# EAGLE board sparkfun-samd21g-r3-panel-v10 (EAGLE 7.4.0), part 1 of 3
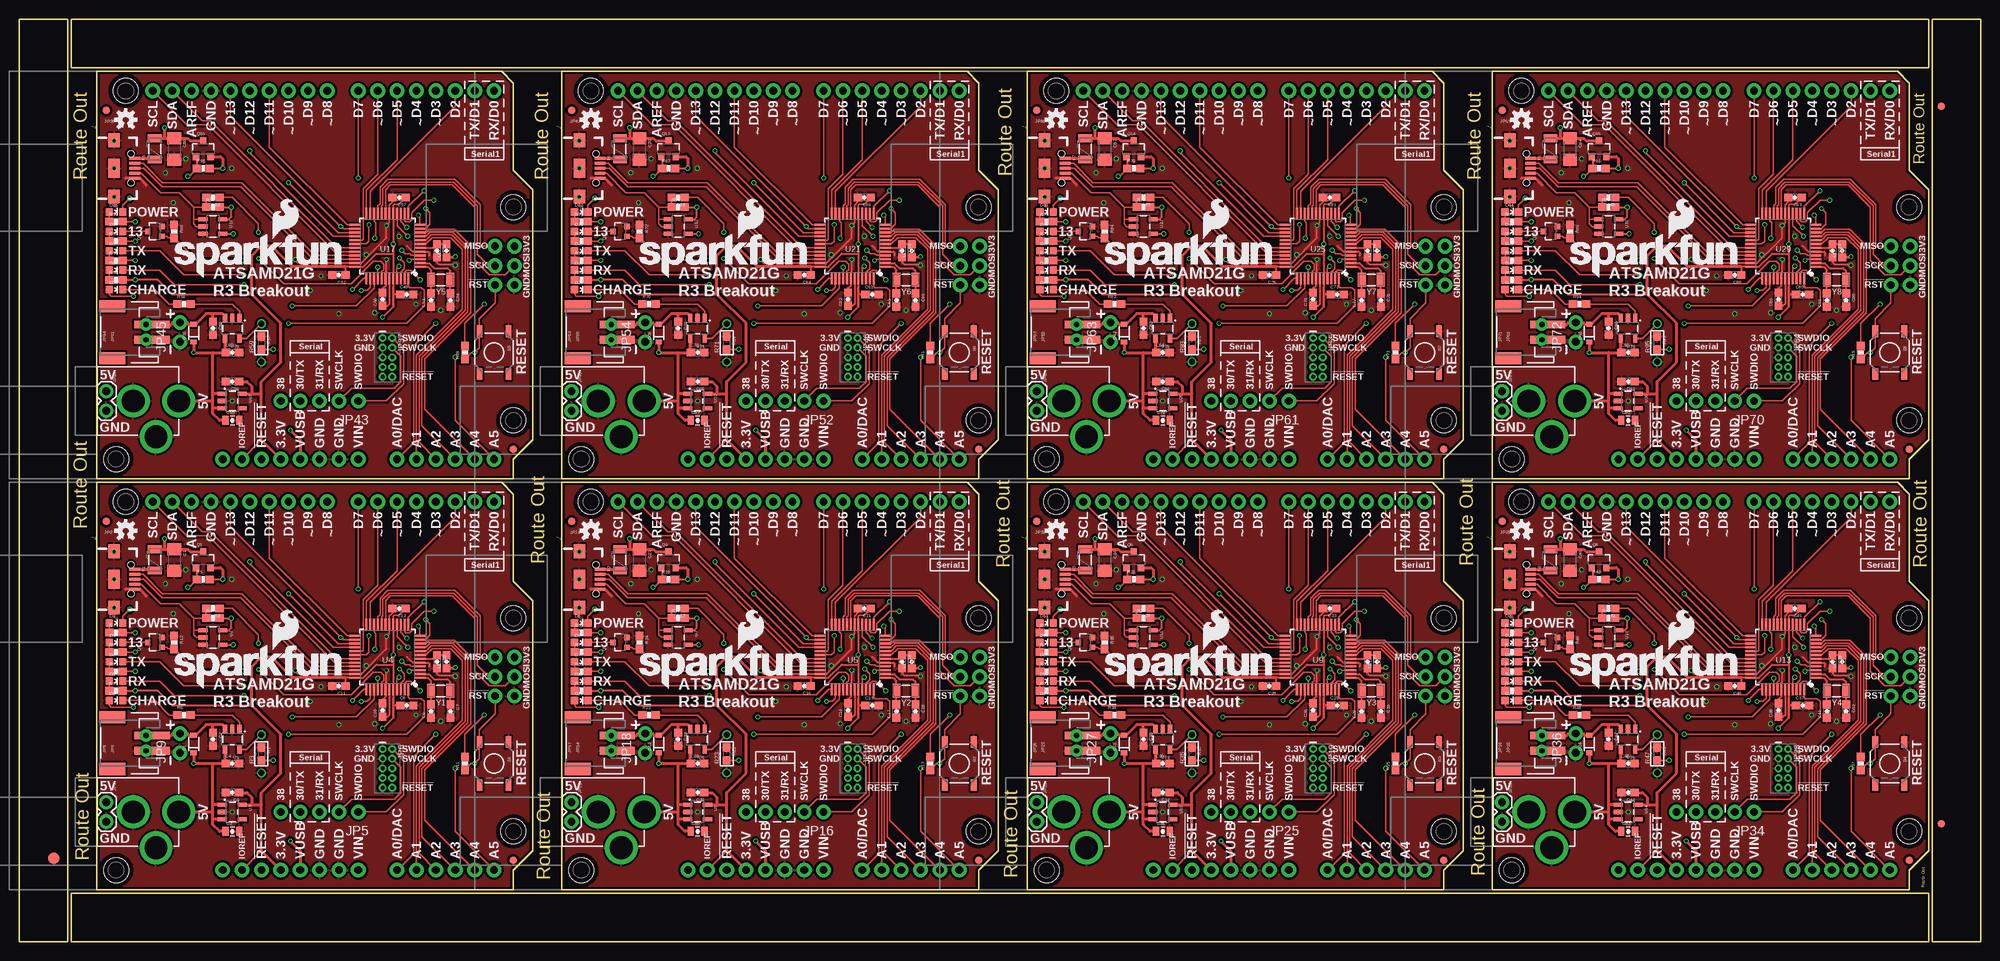
[diagram p0: board, top side]
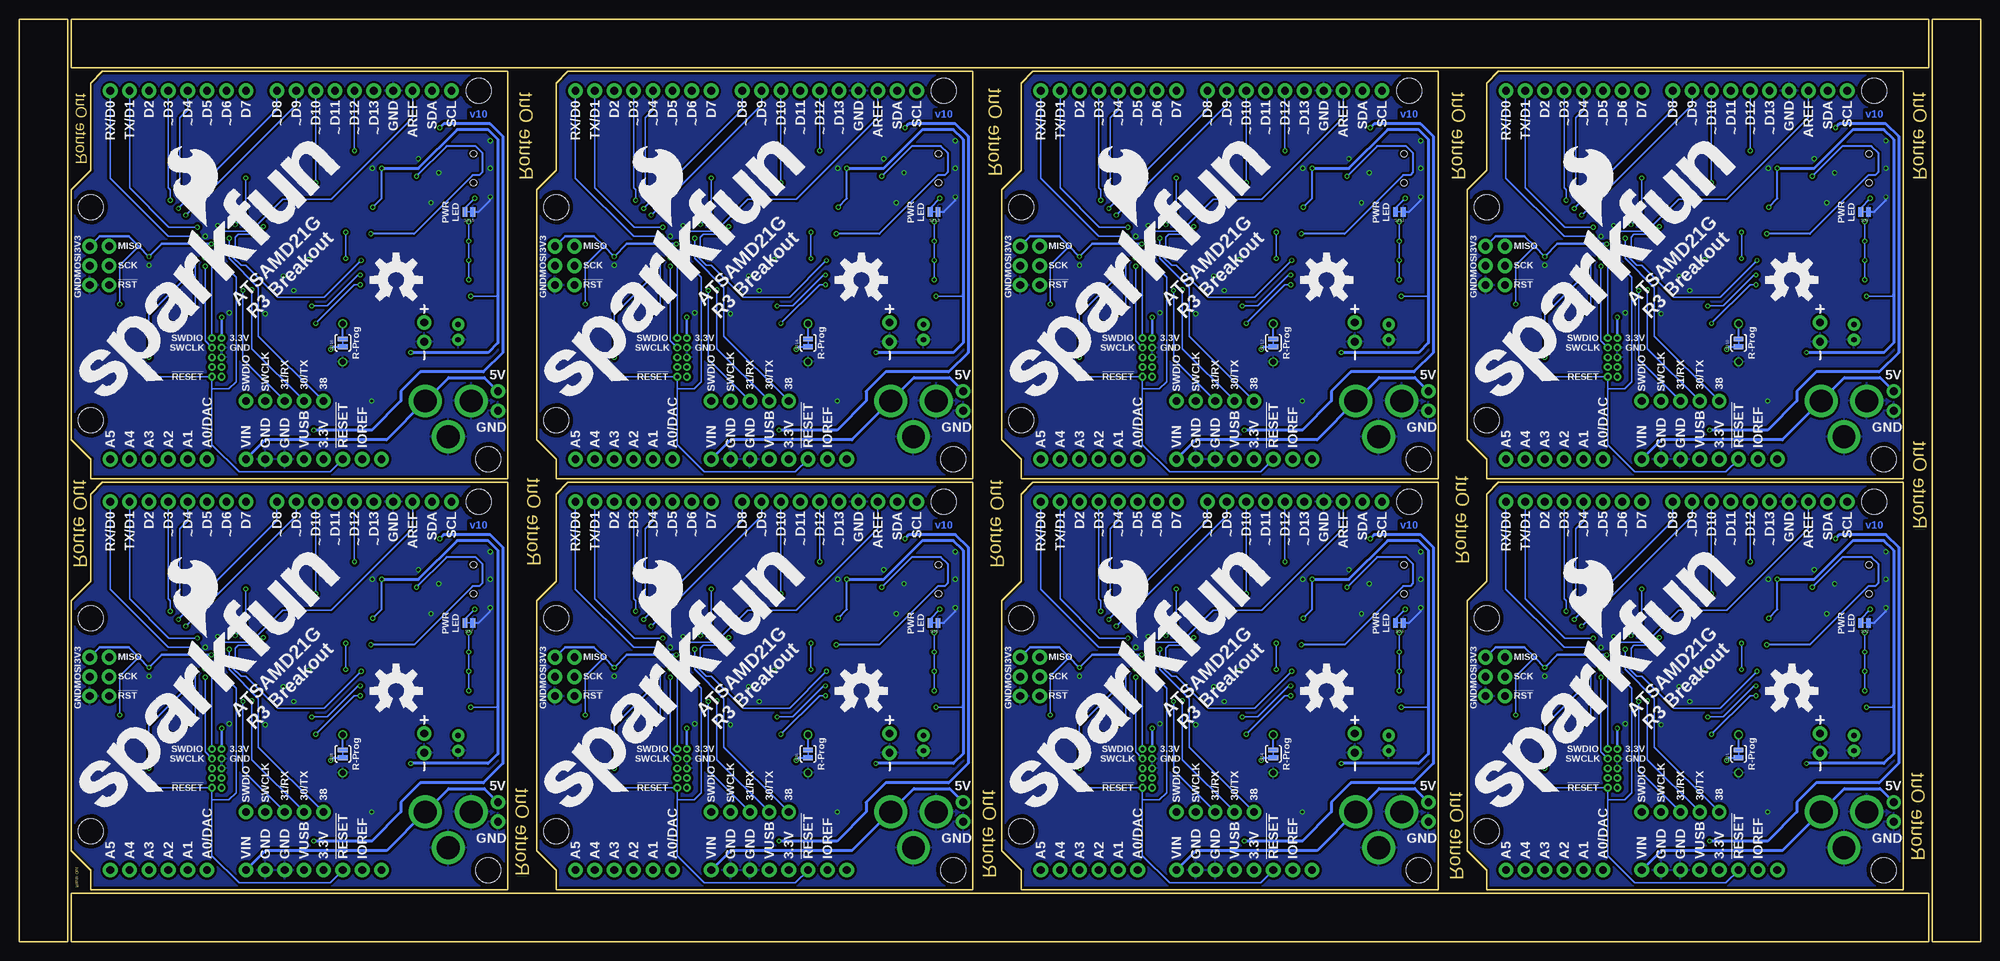
[diagram p1: board, bottom side, seen from below]

Size 257.05 x 120.9 mm. Coordinates in mm from the lower left corner, seen from the top.
Outline: 6.35,79.25 6.35,0 0,0 0,29.72
Outline: 0,27.18 0,120.9 6.35,120.9 6.35,76.71
Outline: 82.55,0 6.86,0 6.86,6.35 33.02,6.35
Outline: 30.48,6.35 250.19,6.35 250.19,0 80.01,0
Outline: 257.05,79.25 257.05,0 250.7,0 250.7,29.72
Outline: 250.7,27.18 250.7,120.9 257.05,120.9 257.05,76.71
Outline: 177.8,120.9 250.19,120.9 250.19,114.55 227.33,114.55
Outline: 229.87,114.55 6.86,114.55 6.86,120.9 180.34,120.9
Outline: 10.16,60.2 10.16,6.86 64.77,6.86 64.77,9.4 67.31,11.94 67.31,44.7 64.77,47.24 64.77,58.67 63.25,60.2 10.16,60.2
Outline: 71.12,60.2 71.12,6.86 125.73,6.86 125.73,9.4 128.27,11.94 128.27,44.7 125.73,47.24 125.73,58.67 124.21,60.2 71.12,60.2
Outline: 132.08,60.2 132.08,6.86 186.69,6.86 186.69,9.4 189.23,11.94 189.23,44.7 186.69,47.24 186.69,58.67 185.17,60.2 132.08,60.2
Outline: 193.04,60.2 193.04,6.86 247.65,6.86 247.65,9.4 250.19,11.94 250.19,44.7 247.65,47.24 247.65,58.67 246.13,60.2 193.04,60.2
Outline: 10.16,114.05 10.16,60.71 64.77,60.71 64.77,63.25 67.31,65.79 67.31,98.55 64.77,101.09 64.77,112.52 63.25,114.05 10.16,114.05
Outline: 71.12,114.05 71.12,60.71 125.73,60.71 125.73,63.25 128.27,65.79 128.27,98.55 125.73,101.09 125.73,112.52 124.21,114.05 71.12,114.05
Outline: 132.08,114.05 132.08,60.71 186.69,60.71 186.69,63.25 189.23,65.79 189.23,98.55 186.69,101.09 186.69,112.52 185.17,114.05 132.08,114.05
Outline: 193.04,114.05 193.04,60.71 247.65,60.71 247.65,63.25 250.19,65.79 250.19,98.55 247.65,101.09 247.65,112.52 246.13,114.05 193.04,114.05
Copper layers (1*16): Top 0.035mm / dielectric 1.5mm / Bottom 0.035mm
Design rules "Gold_Phoenix_Standard_Spec_2_layer": minimum track width 5mil, minimum drill 6mil, track to track 5mil, track to pad 5mil, pad to pad 5mil, via to via 5mil, smd to smd 5mil, copper to edge 8mil, drill to drill 8mil, minimum pad ring 5mil, minimum via ring 5mil, stop-mask expansion 4mil, vias tented up to drill 20mil, thermal gap 10mil

## Footprints (pad centres in the part's own frame; a part is rotated, then mirrored left to right if it is on the bottom)
1206 = smd 1.6 x 1.8: 1 -1.4,0; 2 1.4,0
0603-CAP = smd 1.1 x 1: 1 -0.85,0; 2 0.85,0
0805-CAP = smd 0.8 x 1.2: 1 -0.9,0; 2 0.9,0
SOD-323 = smd 0.63 x 0.83: A 1.15,0; C -1.15,0
LED-0603 = smd 1 x 1: A 0,-0.877; C 0,0.877
FIDUCIAL-1.5X3 = smd 1.5 x 1.5: 1 0,0
FIDUCIAL-1X2 = smd 1 x 1: 1 0,0
PTC-1206 = smd 1 x 1.8: 1 -1.4,0; 2 1.4,0
1X02 = drill 1.016 pad 1.88: 1 0,0; 2 2.54,0
USB-AB-MICRO-SMD_V03 = smd 1.4 x 0.4: D+1 2.7,0; D-1 2.7,0.65; GND1 2.7,-1.3; ID1 2.7,-0.65; VBUS1 2.7,1.3 | smd 1.5 x 1.8: SHIELD1 0,3.68; SHIELD3 0,-3.68 | smd 1.5 x 2.5: SHIELD2 0,0 | hole 0.85: 2.2,1.9; 2.2,-1.9
POWER_JACK_PTH = drill 2.997 pad 4.318: GND 0,7.7; GNDBREAK 4.7,10.7; PWR 0,13.7
JST-2-SMD = smd 1 x 4.6: 1 -1,-3.7; 2 1,-3.7 | smd 1.6 x 3.4: NC1 -3.4,1.5; NC2 3.4,1.5
1X05_NO_SILK = drill 1.016 pad 1.88: 1 0,0; 2 2.54,0; 3 5.08,0; 4 7.62,0; 5 10.16,0
2X5-PTH-1.27MM = drill 0.508 pad 1: 1 -2.54,-0.635; 2 -2.54,0.635; 3 -1.27,-0.635; 4 -1.27,0.635; 5 0,-0.635; 6 0,0.635; 7 1.27,-0.635; 8 1.27,0.635; 9 2.54,-0.635; 10 2.54,0.635
ARDUINO_R3_NO_HOLES = drill 1.016 pad 1.93: 3.3V 35.56,2.54; 5V 38.1,2.54; A0 50.8,2.54; A1 53.34,2.54; A2 55.88,2.54; A3 58.42,2.54; A4 60.96,2.54; A5 63.5,2.54; AREF 23.876,50.8; D0 63.5,50.8; D1 60.96,50.8; D2 58.42,50.8; D3 55.88,50.8; D4 53.34,50.8; D5 50.8,50.8; D6 48.26,50.8; D7 45.72,50.8; D8 41.656,50.8; D9 39.116,50.8; D10 36.576,50.8; D11 34.036,50.8; D12 31.496,50.8; D13 28.956,50.8; GND@1 40.64,2.54; GND@2 43.18,2.54; GND@3 26.416,50.8; GND@4 66.18,25.35; IOREF 30.48,2.54; MISO 63.64,30.43; MOSI 66.18,27.89; NC 27.94,2.54; RESET@1 33.02,2.54; RESET@2 63.64,25.35; SCK 63.64,27.89; SCL 18.796,50.8; SDA 21.336,50.8; VCC 66.18,30.43; VIN 45.72,2.54
JST-2-PTH-NS = drill 0.7 pad 1.6: 1 -1,0; 2 1,0
1X02_NO_SILK = drill 1.016 pad 1.88: 1 0,0; 2 2.54,0
0603 = smd 1.1 x 1: 1 -0.85,0; 2 0.85,0
SOT23-3 = smd 0.8 x 0.9: 1 -0.95,-1; 2 0.95,-1; 3 0,1.1
SOT323 = smd 0.7 x 0.7: 1 -0.65,-0.925; 2 0.65,-0.925; 3 0,0.925
0603-RES = smd 1.1 x 1: 1 -0.85,0; 2 0.85,0
1/6W-RES = drill 0.762: 1 -2.5,0; 2 2.5,0
TACTILE-SWITCH-SMD = smd 1.524 x 0.762: 1 -2.794,1.905; 2 2.794,1.905; 3 -2.794,-1.905; 4 2.794,-1.905
PAD-JUMPER-2-NC_BY_TRACE_YES_SILK = smd 0.635 x 1.27: 1 -0.508,0; 2 0.508,0
PAD-JUMPER-2-NC_BY_TRACE_NO_SILK = smd 0.635 x 1.27: 1 -0.508,0; 2 0.508,0
STAND-OFF = hole 3.302: 0,0
SOT23-5 = smd 0.55 x 1.2: 1 -0.95,-1.3; 2 0,-1.3; 3 0.95,-1.3; 4 0.95,1.3; 5 -0.95,1.3
TQFP-48 = smd 1.5 x 0.28: 1 -4.25,2.75; 2 -4.25,2.25; 3 -4.25,1.75; 4 -4.25,1.25; 5 -4.25,0.75; 6 -4.25,0.25; 7 -4.25,-0.25; 8 -4.25,-0.75; 9 -4.25,-1.25; 10 -4.25,-1.75; 11 -4.25,-2.25; 12 -4.25,-2.75; 25 4.25,-2.75; 26 4.25,-2.25; 27 4.25,-1.75; 28 4.25,-1.25; 29 4.25,-0.75; 30 4.25,-0.25; 31 4.25,0.25; 32 4.25,0.75; 33 4.25,1.25; 34 4.25,1.75; 35 4.25,2.25; 36 4.25,2.75 | smd 0.28 x 1.5: 13 -2.75,-4.25; 14 -2.25,-4.25; 15 -1.75,-4.25; 16 -1.25,-4.25; 17 -0.75,-4.25; 18 -0.25,-4.25; 19 0.25,-4.25; 20 0.75,-4.25; 21 1.25,-4.25; 22 1.75,-4.25; 23 2.25,-4.25; 24 2.75,-4.25; 37 2.75,4.25; 38 2.25,4.25; 39 1.75,4.25; 40 1.25,4.25; 41 0.75,4.25; 42 0.25,4.25; 43 -0.25,4.25; 44 -0.75,4.25; 45 -1.25,4.25; 46 -1.75,4.25; 47 -2.25,4.25; 48 -2.75,4.25
CRYSTAL-SMD-3.2X1.5MM = smd 1 x 1.8: P$1 -1.25,0; P$2 1.25,0

## Placement (x,y rotation side)
C1  2.2UF  [1206]  20.32,50.04 270 top
C2  4.7uF  [0603-CAP]  25.4,26.54 270 top
C3  1.0uF  [0805-CAP]  27.94,14.48 0 top
C4  4.7uF  [0603-CAP]  27.94,23.37 0 top
C5  2.2uF  [0603-CAP]  27.94,19.56 180 top
C6  0.1uF  [0603-CAP]  54.74,36.7 270 top
C7  15pF  [0603-CAP]  56.52,30.23 270 top
C8  0.1uF  [0603-CAP]  50.8,30.99 0 top
C9  15pF  [0603-CAP]  53.98,30.23 90 top
C10  0.1uF  [0603-CAP]  47.62,30.35 90 top
C11  0.1uF  [0603-CAP]  41.91,33.53 180 top
C12  0.1uF  [0603-CAP]  49.78,43.69 180 top
C13  0.1uF  [0603-CAP]  111.76,30.99 0 top
C14  0.1uF  [0603-CAP]  108.58,30.35 90 top
C15  0.1uF  [0603-CAP]  115.7,36.7 270 top
C16  0.1uF  [0603-CAP]  102.87,33.53 180 top
C17  15pF  [0603-CAP]  114.94,30.23 90 top
C18  15pF  [0603-CAP]  117.47,30.23 270 top
C19  1.0uF  [0805-CAP]  88.9,14.48 0 top
C20  2.2uF  [0603-CAP]  88.9,19.56 180 top
C21  0.1uF  [0603-CAP]  110.74,43.69 180 top
C22  2.2UF  [1206]  81.28,50.04 270 top
C23  4.7uF  [0603-CAP]  86.36,26.54 270 top
C24  4.7uF  [0603-CAP]  88.9,23.37 0 top
C25  0.1uF  [0603-CAP]  172.72,30.99 0 top
C26  0.1uF  [0603-CAP]  169.54,30.35 90 top
C27  0.1uF  [0603-CAP]  176.66,36.7 270 top
C28  0.1uF  [0603-CAP]  163.83,33.53 180 top
C29  15pF  [0603-CAP]  175.9,30.23 90 top
C30  15pF  [0603-CAP]  178.44,30.23 270 top
C31  1.0uF  [0805-CAP]  149.86,14.48 0 top
C32  2.2uF  [0603-CAP]  149.86,19.56 180 top
C33  0.1uF  [0603-CAP]  171.7,43.69 180 top
C34  2.2UF  [1206]  142.24,50.04 270 top
C35  4.7uF  [0603-CAP]  147.32,26.54 270 top
C36  4.7uF  [0603-CAP]  149.86,23.37 0 top
C37  0.1uF  [0603-CAP]  233.68,30.99 0 top
C38  0.1uF  [0603-CAP]  230.5,30.35 90 top
C39  0.1uF  [0603-CAP]  237.62,36.7 270 top
C40  0.1uF  [0603-CAP]  224.79,33.53 180 top
C41  15pF  [0603-CAP]  236.85,30.23 90 top
C42  15pF  [0603-CAP]  239.4,30.23 270 top
C43  1.0uF  [0805-CAP]  210.82,14.48 0 top
C44  2.2uF  [0603-CAP]  210.82,19.56 180 top
C45  0.1uF  [0603-CAP]  232.66,43.69 180 top
C46  2.2UF  [1206]  203.2,50.04 270 top
C47  4.7uF  [0603-CAP]  208.28,26.54 270 top
C48  4.7uF  [0603-CAP]  210.82,23.37 0 top
C49  0.1uF  [0603-CAP]  50.8,84.84 0 top
C50  0.1uF  [0603-CAP]  47.62,84.2 90 top
C51  0.1uF  [0603-CAP]  54.74,90.55 270 top
C52  0.1uF  [0603-CAP]  41.91,87.38 180 top
C53  15pF  [0603-CAP]  53.98,84.07 90 top
C54  15pF  [0603-CAP]  56.52,84.07 270 top
C55  1.0uF  [0805-CAP]  27.94,68.33 0 top
C56  2.2uF  [0603-CAP]  27.94,73.41 180 top
C57  0.1uF  [0603-CAP]  49.78,97.54 180 top
C58  2.2UF  [1206]  20.32,103.89 270 top
C59  4.7uF  [0603-CAP]  25.4,80.39 270 top
C60  4.7uF  [0603-CAP]  27.94,77.22 0 top
C61  0.1uF  [0603-CAP]  111.76,84.84 0 top
C62  0.1uF  [0603-CAP]  108.58,84.2 90 top
C63  0.1uF  [0603-CAP]  115.7,90.55 270 top
C64  0.1uF  [0603-CAP]  102.87,87.38 180 top
C65  15pF  [0603-CAP]  114.94,84.07 90 top
C66  15pF  [0603-CAP]  117.47,84.07 270 top
C67  1.0uF  [0805-CAP]  88.9,68.33 0 top
C68  2.2uF  [0603-CAP]  88.9,73.41 180 top
C69  0.1uF  [0603-CAP]  110.74,97.54 180 top
C70  2.2UF  [1206]  81.28,103.89 270 top
C71  4.7uF  [0603-CAP]  86.36,80.39 270 top
C72  4.7uF  [0603-CAP]  88.9,77.22 0 top
C73  0.1uF  [0603-CAP]  172.72,84.84 0 top
C74  0.1uF  [0603-CAP]  169.54,84.2 90 top
C75  0.1uF  [0603-CAP]  176.66,90.55 270 top
C76  0.1uF  [0603-CAP]  163.83,87.38 180 top
C77  15pF  [0603-CAP]  175.9,84.07 90 top
C78  15pF  [0603-CAP]  178.44,84.07 270 top
C79  1.0uF  [0805-CAP]  149.86,68.33 0 top
C80  2.2uF  [0603-CAP]  149.86,73.41 180 top
C81  0.1uF  [0603-CAP]  171.7,97.54 180 top
C82  2.2UF  [1206]  142.24,103.89 270 top
C83  4.7uF  [0603-CAP]  147.32,80.39 270 top
C84  4.7uF  [0603-CAP]  149.86,77.22 0 top
C85  0.1uF  [0603-CAP]  233.68,84.84 0 top
C86  0.1uF  [0603-CAP]  230.5,84.2 90 top
C87  0.1uF  [0603-CAP]  237.62,90.55 270 top
C88  0.1uF  [0603-CAP]  224.79,87.38 180 top
C89  15pF  [0603-CAP]  236.85,84.07 90 top
C90  15pF  [0603-CAP]  239.4,84.07 270 top
C91  1.0uF  [0805-CAP]  210.82,68.33 0 top
C92  2.2uF  [0603-CAP]  210.82,73.41 180 top
C93  0.1uF  [0603-CAP]  232.66,97.54 180 top
C94  2.2UF  [1206]  203.2,103.89 270 top
C95  4.7uF  [0603-CAP]  208.28,80.39 270 top
C96  4.7uF  [0603-CAP]  210.82,77.22 0 top
D1  BAT20J  [SOD-323]  22.86,25.91 90 top
D2  RED  [LED-0603]  12.7,31.62 270 top
D3  RED  [LED-0603]  12.7,41.78 270 top
D4  BLUE  [LED-0603]  12.7,39.24 270 top
D5  GREEN  [LED-0603]  12.7,36.7 270 top
D6  Yellow  [LED-0603]  12.7,34.16 270 top
D7  GREEN  [LED-0603]  73.66,36.7 270 top
D8  RED  [LED-0603]  73.66,41.78 270 top
D9  BLUE  [LED-0603]  73.66,39.24 270 top
D10  Yellow  [LED-0603]  73.66,34.16 270 top
D11  RED  [LED-0603]  73.66,31.62 270 top
D12  BAT20J  [SOD-323]  83.82,25.91 90 top
D13  GREEN  [LED-0603]  134.62,36.7 270 top
D14  RED  [LED-0603]  134.62,41.78 270 top
D15  BLUE  [LED-0603]  134.62,39.24 270 top
D16  Yellow  [LED-0603]  134.62,34.16 270 top
D17  RED  [LED-0603]  134.62,31.62 270 top
D18  BAT20J  [SOD-323]  144.78,25.91 90 top
D19  GREEN  [LED-0603]  195.58,36.7 270 top
D20  RED  [LED-0603]  195.58,41.78 270 top
D21  BLUE  [LED-0603]  195.58,39.24 270 top
D22  Yellow  [LED-0603]  195.58,34.16 270 top
D23  RED  [LED-0603]  195.58,31.62 270 top
D24  BAT20J  [SOD-323]  205.74,25.91 90 top
D25  GREEN  [LED-0603]  12.7,90.55 270 top
D26  RED  [LED-0603]  12.7,95.63 270 top
D27  BLUE  [LED-0603]  12.7,93.09 270 top
D28  Yellow  [LED-0603]  12.7,88.01 270 top
D29  RED  [LED-0603]  12.7,85.47 270 top
D30  BAT20J  [SOD-323]  22.86,79.76 90 top
D31  GREEN  [LED-0603]  73.66,90.55 270 top
D32  RED  [LED-0603]  73.66,95.63 270 top
D33  BLUE  [LED-0603]  73.66,93.09 270 top
D34  Yellow  [LED-0603]  73.66,88.01 270 top
D35  RED  [LED-0603]  73.66,85.47 270 top
D36  BAT20J  [SOD-323]  83.82,79.76 90 top
D37  GREEN  [LED-0603]  134.62,90.55 270 top
D38  RED  [LED-0603]  134.62,95.63 270 top
D39  BLUE  [LED-0603]  134.62,93.09 270 top
D40  Yellow  [LED-0603]  134.62,88.01 270 top
D41  RED  [LED-0603]  134.62,85.47 270 top
D42  BAT20J  [SOD-323]  144.78,79.76 90 top
D43  GREEN  [LED-0603]  195.58,90.55 270 top
D44  RED  [LED-0603]  195.58,95.63 270 top
D45  BLUE  [LED-0603]  195.58,93.09 270 top
D46  Yellow  [LED-0603]  195.58,88.01 270 top
D47  RED  [LED-0603]  195.58,85.47 270 top
D48  BAT20J  [SOD-323]  205.74,79.76 90 top
E$1  [FIDUCIAL-1.5X3]  4.57,10.92 0 top
E$5  [FIDUCIAL-1X2]  251.84,15.49 0 top
E$6  [FIDUCIAL-1X2]  251.84,109.47 180 top
F1  500mA  [PTC-1206]  17.78,50.04 90 top
F2  500mA  [PTC-1206]  78.74,50.04 90 top
F3  500mA  [PTC-1206]  139.7,50.04 90 top
F4  500mA  [PTC-1206]  200.66,50.04 90 top
F5  500mA  [PTC-1206]  17.78,103.89 90 top
F6  500mA  [PTC-1206]  78.74,103.89 90 top
F7  500mA  [PTC-1206]  139.7,103.89 90 top
F8  500mA  [PTC-1206]  200.66,103.89 90 top
FID1  FIDUCIAL1X2  [FIDUCIAL-1X2]  11.43,55.12 0 top
FID2  FIDUCIAL1X2  [FIDUCIAL-1X2]  64.77,10.67 0 top
FID3  FIDUCIAL1X2  [FIDUCIAL-1X2]  125.73,10.67 0 top
FID4  FIDUCIAL1X2  [FIDUCIAL-1X2]  72.39,55.12 0 top
FID5  FIDUCIAL1X2  [FIDUCIAL-1X2]  186.69,10.67 0 top
FID6  FIDUCIAL1X2  [FIDUCIAL-1X2]  133.35,55.12 0 top
FID7  FIDUCIAL1X2  [FIDUCIAL-1X2]  247.65,10.67 0 top
FID8  FIDUCIAL1X2  [FIDUCIAL-1X2]  194.31,55.12 0 top
FID9  FIDUCIAL1X2  [FIDUCIAL-1X2]  64.77,64.52 0 top
FID10  FIDUCIAL1X2  [FIDUCIAL-1X2]  11.43,108.97 0 top
FID11  FIDUCIAL1X2  [FIDUCIAL-1X2]  125.73,64.52 0 top
FID12  FIDUCIAL1X2  [FIDUCIAL-1X2]  72.39,108.97 0 top
FID13  FIDUCIAL1X2  [FIDUCIAL-1X2]  186.69,64.52 0 top
FID14  FIDUCIAL1X2  [FIDUCIAL-1X2]  133.35,108.97 0 top
FID15  FIDUCIAL1X2  [FIDUCIAL-1X2]  247.65,64.52 0 top
FID16  FIDUCIAL1X2  [FIDUCIAL-1X2]  194.31,108.97 0 top
JP1  [1X02]  11.43,15.75 90 top
JP2  [USB-AB-MICRO-SMD_V03]  12.45,47.5 0 top
JP3  POWER_JACKPTH  [POWER_JACK_PTH]  7.24,17.02 270 top
JP4  [JST-2-SMD]  13.72,26.04 90 top
JP5  [1X05_NO_SILK]  44.45,17.02 180 top
JP6  CORTEX_DEBUGPTH  [2X5-PTH-1.27MM]  48.26,22.73 270 top
JP7  ARDUINO_R3NO_HOLES  [ARDUINO_R3_NO_HOLES]  -1.27,6.86 0 top
JP8  [JST-2-PTH-NS]  16.64,26.04 90 top
JP9  [1X02_NO_SILK]  21.08,24.77 90 top
JP10  CORTEX_DEBUGPTH  [2X5-PTH-1.27MM]  109.22,22.73 270 top
JP11  [USB-AB-MICRO-SMD_V03]  73.41,47.5 0 top
JP12  ARDUINO_R3NO_HOLES  [ARDUINO_R3_NO_HOLES]  59.69,6.86 0 top
JP13  POWER_JACKPTH  [POWER_JACK_PTH]  68.2,17.02 270 top
JP14  [JST-2-SMD]  74.68,26.04 90 top
JP15  [1X02]  72.39,15.75 90 top
JP16  [1X05_NO_SILK]  105.41,17.02 180 top
JP17  [JST-2-PTH-NS]  77.6,26.04 90 top
JP18  [1X02_NO_SILK]  82.04,24.77 90 top
JP19  CORTEX_DEBUGPTH  [2X5-PTH-1.27MM]  170.18,22.73 270 top
JP20  [USB-AB-MICRO-SMD_V03]  134.37,47.5 0 top
JP21  ARDUINO_R3NO_HOLES  [ARDUINO_R3_NO_HOLES]  120.65,6.86 0 top
JP22  POWER_JACKPTH  [POWER_JACK_PTH]  129.16,17.02 270 top
JP23  [JST-2-SMD]  135.64,26.04 90 top
JP24  [1X02]  133.35,15.75 90 top
JP25  [1X05_NO_SILK]  166.37,17.02 180 top
JP26  [JST-2-PTH-NS]  138.56,26.04 90 top
JP27  [1X02_NO_SILK]  143,24.77 90 top
JP28  CORTEX_DEBUGPTH  [2X5-PTH-1.27MM]  231.14,22.73 270 top
JP29  [USB-AB-MICRO-SMD_V03]  195.33,47.5 0 top
JP30  ARDUINO_R3NO_HOLES  [ARDUINO_R3_NO_HOLES]  181.61,6.86 0 top
JP31  POWER_JACKPTH  [POWER_JACK_PTH]  190.12,17.02 270 top
JP32  [JST-2-SMD]  196.6,26.04 90 top
JP33  [1X02]  194.31,15.75 90 top
JP34  [1X05_NO_SILK]  227.33,17.02 180 top
JP35  [JST-2-PTH-NS]  199.52,26.04 90 top
JP36  [1X02_NO_SILK]  203.96,24.77 90 top
JP37  CORTEX_DEBUGPTH  [2X5-PTH-1.27MM]  48.26,76.58 270 top
JP38  [USB-AB-MICRO-SMD_V03]  12.45,101.35 0 top
JP39  ARDUINO_R3NO_HOLES  [ARDUINO_R3_NO_HOLES]  -1.27,60.71 0 top
JP40  POWER_JACKPTH  [POWER_JACK_PTH]  7.24,70.87 270 top
JP41  [JST-2-SMD]  13.72,79.88 90 top
JP42  [1X02]  11.43,69.6 90 top
JP43  [1X05_NO_SILK]  44.45,70.87 180 top
JP44  [JST-2-PTH-NS]  16.64,79.88 90 top
JP45  [1X02_NO_SILK]  21.08,78.61 90 top
JP46  CORTEX_DEBUGPTH  [2X5-PTH-1.27MM]  109.22,76.58 270 top
JP47  [USB-AB-MICRO-SMD_V03]  73.41,101.35 0 top
JP48  ARDUINO_R3NO_HOLES  [ARDUINO_R3_NO_HOLES]  59.69,60.71 0 top
JP49  POWER_JACKPTH  [POWER_JACK_PTH]  68.2,70.87 270 top
JP50  [JST-2-SMD]  74.68,79.88 90 top
JP51  [1X02]  72.39,69.6 90 top
JP52  [1X05_NO_SILK]  105.41,70.87 180 top
JP53  [JST-2-PTH-NS]  77.6,79.88 90 top
JP54  [1X02_NO_SILK]  82.04,78.61 90 top
JP55  CORTEX_DEBUGPTH  [2X5-PTH-1.27MM]  170.18,76.58 270 top
JP56  [USB-AB-MICRO-SMD_V03]  134.37,101.35 0 top
JP57  ARDUINO_R3NO_HOLES  [ARDUINO_R3_NO_HOLES]  120.65,60.71 0 top
JP58  POWER_JACKPTH  [POWER_JACK_PTH]  129.16,70.87 270 top
JP59  [JST-2-SMD]  135.64,79.88 90 top
JP60  [1X02]  133.35,69.6 90 top
JP61  [1X05_NO_SILK]  166.37,70.87 180 top
JP62  [JST-2-PTH-NS]  138.56,79.88 90 top
JP63  [1X02_NO_SILK]  143,78.61 90 top
JP64  CORTEX_DEBUGPTH  [2X5-PTH-1.27MM]  231.14,76.58 270 top
JP65  [USB-AB-MICRO-SMD_V03]  195.33,101.35 0 top
JP66  ARDUINO_R3NO_HOLES  [ARDUINO_R3_NO_HOLES]  181.61,60.71 0 top
JP67  POWER_JACKPTH  [POWER_JACK_PTH]  190.12,70.87 270 top
JP68  [JST-2-SMD]  196.6,79.88 90 top
JP69  [1X02]  194.31,69.6 90 top
JP70  [1X05_NO_SILK]  227.33,70.87 180 top
JP71  [JST-2-PTH-NS]  199.52,79.88 90 top
JP72  [1X02_NO_SILK]  203.96,78.61 90 top
L1  FB - 30Ohm  [0603]  56.01,36.7 90 top
L2  FB - 30Ohm  [0603]  116.97,36.7 90 top
L3  FB - 30Ohm  [0603]  177.93,36.7 90 top
L4  FB - 30Ohm  [0603]  238.89,36.7 90 top
L5  FB - 30Ohm  [0603]  56.01,90.55 90 top
L6  FB - 30Ohm  [0603]  116.97,90.55 90 top
L7  FB - 30Ohm  [0603]  177.93,90.55 90 top
L8  FB - 30Ohm  [0603]  238.89,90.55 90 top
LOGO1  SFE_LOGO_NAME_FLAME.2_INCH  [SFE_LOGO_NAME_FLAME_.2]  19.68,33.15 0 top
LOGO2  SFE_LOGO_NAME_FLAME.4_INCH  [SFE_LOGO_NAME_FLAME_.4]  60.96,13.84 45 bottom
LOGO3  OSHW-LOGOS  [OSHW-LOGO-S]  13.97,53.85 0 top
LOGO4  OSHW-LOGOL  [OSHW-LOGO-L]  24.77,32.89 0 bottom
LOGO5  OSHW-LOGOS  [OSHW-LOGO-S]  74.93,53.85 0 top
LOGO6  SFE_LOGO_NAME_FLAME.2_INCH  [SFE_LOGO_NAME_FLAME_.2]  80.64,33.15 0 top
LOGO7  SFE_LOGO_NAME_FLAME.4_INCH  [SFE_LOGO_NAME_FLAME_.4]  121.92,13.84 45 bottom
LOGO8  OSHW-LOGOL  [OSHW-LOGO-L]  85.72,32.89 0 bottom
LOGO9  OSHW-LOGOS  [OSHW-LOGO-S]  135.89,53.85 0 top
LOGO10  SFE_LOGO_NAME_FLAME.2_INCH  [SFE_LOGO_NAME_FLAME_.2]  141.6,33.15 0 top
LOGO11  SFE_LOGO_NAME_FLAME.4_INCH  [SFE_LOGO_NAME_FLAME_.4]  182.88,13.84 45 bottom
LOGO12  OSHW-LOGOL  [OSHW-LOGO-L]  146.69,32.89 0 bottom
LOGO13  OSHW-LOGOS  [OSHW-LOGO-S]  196.85,53.85 0 top
LOGO14  SFE_LOGO_NAME_FLAME.2_INCH  [SFE_LOGO_NAME_FLAME_.2]  202.56,33.15 0 top
LOGO15  SFE_LOGO_NAME_FLAME.4_INCH  [SFE_LOGO_NAME_FLAME_.4]  243.84,13.84 45 bottom
LOGO16  OSHW-LOGOL  [OSHW-LOGO-L]  207.65,32.89 0 bottom
LOGO17  OSHW-LOGOS  [OSHW-LOGO-S]  13.97,107.7 0 top
LOGO18  SFE_LOGO_NAME_FLAME.2_INCH  [SFE_LOGO_NAME_FLAME_.2]  19.68,87 0 top
LOGO19  SFE_LOGO_NAME_FLAME.4_INCH  [SFE_LOGO_NAME_FLAME_.4]  60.96,67.69 45 bottom
LOGO20  OSHW-LOGOL  [OSHW-LOGO-L]  24.77,86.74 0 bottom
LOGO21  OSHW-LOGOS  [OSHW-LOGO-S]  74.93,107.7 0 top
LOGO22  SFE_LOGO_NAME_FLAME.2_INCH  [SFE_LOGO_NAME_FLAME_.2]  80.64,87 0 top
LOGO23  SFE_LOGO_NAME_FLAME.4_INCH  [SFE_LOGO_NAME_FLAME_.4]  121.92,67.69 45 bottom
LOGO24  OSHW-LOGOL  [OSHW-LOGO-L]  85.72,86.74 0 bottom
LOGO25  OSHW-LOGOS  [OSHW-LOGO-S]  135.89,107.7 0 top
LOGO26  SFE_LOGO_NAME_FLAME.2_INCH  [SFE_LOGO_NAME_FLAME_.2]  141.6,87 0 top
LOGO27  SFE_LOGO_NAME_FLAME.4_INCH  [SFE_LOGO_NAME_FLAME_.4]  182.88,67.69 45 bottom
LOGO28  OSHW-LOGOL  [OSHW-LOGO-L]  146.69,86.74 0 bottom
LOGO29  OSHW-LOGOS  [OSHW-LOGO-S]  196.85,107.7 0 top
LOGO30  SFE_LOGO_NAME_FLAME.2_INCH  [SFE_LOGO_NAME_FLAME_.2]  202.56,87 0 top
LOGO31  SFE_LOGO_NAME_FLAME.4_INCH  [SFE_LOGO_NAME_FLAME_.4]  243.84,67.69 45 bottom
LOGO32  OSHW-LOGOL  [OSHW-LOGO-L]  207.65,86.74 0 bottom
Q1  2.5A/30V  [SOT23-3]  24.13,50.04 0 top
Q2  2N7002PW  [SOT323]  17.78,39.24 90 top
Q3  2N7002PW  [SOT323]  78.74,39.24 90 top
Q4  2.5A/30V  [SOT23-3]  85.09,50.04 0 top
Q5  2N7002PW  [SOT323]  139.7,39.24 90 top
Q6  2.5A/30V  [SOT23-3]  146.05,50.04 0 top
Q7  2N7002PW  [SOT323]  200.66,39.24 90 top
Q8  2.5A/30V  [SOT23-3]  207.01,50.04 0 top
Q9  2N7002PW  [SOT323]  17.78,93.09 90 top
Q10  2.5A/30V  [SOT23-3]  24.13,103.89 0 top
Q11  2N7002PW  [SOT323]  78.74,93.09 90 top
Q12  2.5A/30V  [SOT23-3]  85.09,103.89 0 top
Q13  2N7002PW  [SOT323]  139.7,93.09 90 top
Q14  2.5A/30V  [SOT23-3]  146.05,103.89 0 top
Q15  2N7002PW  [SOT323]  200.66,93.09 90 top
Q16  2.5A/30V  [SOT23-3]  207.01,103.89 0 top
R1  3.9K  [0603]  31.75,24.64 270 top
R2  330  [0603-RES]  25.4,43.69 180 top
R3  PROG  [1/6W-RES]  31.75,24.64 90 top
R4  100k  [0603-RES]  25.4,42.42 0 top
R5  47K  [0603-RES]  24.13,47.5 0 top
R6  330  [0603-RES]  21.59,29.72 0 top
R7  330  [0603-RES]  12.7,40.51 0 top
R8  330  [0603-RES]  12.7,37.97 0 top
R9  330  [0603-RES]  12.7,35.43 0 top
R10  330  [0603-RES]  12.7,32.89 0 top
R11  10K  [0603-RES]  58.42,23.37 90 top
R12  100k  [0603-RES]  20.32,39.24 270 top
R13  10K  [0603-RES]  119.38,23.37 90 top
R14  330  [0603-RES]  73.66,40.51 0 top
R15  330  [0603-RES]  73.66,37.97 0 top
R16  100k  [0603-RES]  86.36,42.42 0 top
R17  330  [0603-RES]  86.36,43.69 180 top
R18  330  [0603-RES]  73.66,35.43 0 top
R19  47K  [0603-RES]  85.09,47.5 0 top
R20  330  [0603-RES]  73.66,32.89 0 top
R21  3.9K  [0603]  92.71,24.64 270 top
R22  330  [0603-RES]  82.55,29.72 0 top
R23  PROG  [1/6W-RES]  92.71,24.64 90 top
R24  100k  [0603-RES]  81.28,39.24 270 top
R25  10K  [0603-RES]  180.34,23.37 90 top
R26  330  [0603-RES]  134.62,40.51 0 top
R27  330  [0603-RES]  134.62,37.97 0 top
R28  100k  [0603-RES]  147.32,42.42 0 top
R29  330  [0603-RES]  147.32,43.69 180 top
R30  330  [0603-RES]  134.62,35.43 0 top
R31  47K  [0603-RES]  146.05,47.5 0 top
R32  330  [0603-RES]  134.62,32.89 0 top
R33  3.9K  [0603]  153.67,24.64 270 top
R34  330  [0603-RES]  143.51,29.72 0 top
R35  PROG  [1/6W-RES]  153.67,24.64 90 top
R36  100k  [0603-RES]  142.24,39.24 270 top
R37  10K  [0603-RES]  241.3,23.37 90 top
R38  330  [0603-RES]  195.58,40.51 0 top
R39  330  [0603-RES]  195.58,37.97 0 top
R40  100k  [0603-RES]  208.28,42.42 0 top
R41  330  [0603-RES]  208.28,43.69 180 top
R42  330  [0603-RES]  195.58,35.43 0 top
R43  47K  [0603-RES]  207.01,47.5 0 top
R44  330  [0603-RES]  195.58,32.89 0 top
R45  3.9K  [0603]  214.63,24.64 270 top
R46  330  [0603-RES]  204.47,29.72 0 top
R47  PROG  [1/6W-RES]  214.63,24.64 90 top
R48  100k  [0603-RES]  203.2,39.24 270 top
R49  10K  [0603-RES]  58.42,77.22 90 top
R50  330  [0603-RES]  12.7,94.36 0 top
R51  330  [0603-RES]  12.7,91.82 0 top
R52  100k  [0603-RES]  25.4,96.27 0 top
R53  330  [0603-RES]  25.4,97.54 180 top
R54  330  [0603-RES]  12.7,89.28 0 top
R55  47K  [0603-RES]  24.13,101.35 0 top
R56  330  [0603-RES]  12.7,86.74 0 top
R57  3.9K  [0603]  31.75,78.49 270 top
R58  330  [0603-RES]  21.59,83.57 0 top
R59  PROG  [1/6W-RES]  31.75,78.49 90 top
R60  100k  [0603-RES]  20.32,93.09 270 top
R61  10K  [0603-RES]  119.38,77.22 90 top
R62  330  [0603-RES]  73.66,94.36 0 top
R63  330  [0603-RES]  73.66,91.82 0 top
R64  100k  [0603-RES]  86.36,96.27 0 top
R65  330  [0603-RES]  86.36,97.54 180 top
R66  330  [0603-RES]  73.66,89.28 0 top
R67  47K  [0603-RES]  85.09,101.35 0 top
R68  330  [0603-RES]  73.66,86.74 0 top
R69  3.9K  [0603]  92.71,78.49 270 top
R70  330  [0603-RES]  82.55,83.57 0 top
R71  PROG  [1/6W-RES]  92.71,78.49 90 top
R72  100k  [0603-RES]  81.28,93.09 270 top
R73  10K  [0603-RES]  180.34,77.22 90 top
R74  330  [0603-RES]  134.62,94.36 0 top
R75  330  [0603-RES]  134.62,91.82 0 top
R76  100k  [0603-RES]  147.32,96.27 0 top
R77  330  [0603-RES]  147.32,97.54 180 top
R78  330  [0603-RES]  134.62,89.28 0 top
R79  47K  [0603-RES]  146.05,101.35 0 top
R80  330  [0603-RES]  134.62,86.74 0 top
R81  3.9K  [0603]  153.67,78.49 270 top
R82  330  [0603-RES]  143.51,83.57 0 top
R83  PROG  [1/6W-RES]  153.67,78.49 90 top
R84  100k  [0603-RES]  142.24,93.09 270 top
R85  10K  [0603-RES]  241.3,77.22 90 top
R86  330  [0603-RES]  195.58,94.36 0 top
R87  330  [0603-RES]  195.58,91.82 0 top
R88  100k  [0603-RES]  208.28,96.27 0 top
R89  330  [0603-RES]  208.28,97.54 180 top
R90  330  [0603-RES]  195.58,89.28 0 top
R91  47K  [0603-RES]  207.01,101.35 0 top
R92  330  [0603-RES]  195.58,86.74 0 top
R93  3.9K  [0603]  214.63,78.49 270 top
R94  330  [0603-RES]  204.47,83.57 0 top
R95  PROG  [1/6W-RES]  214.63,78.49 90 top
R96  100k  [0603-RES]  203.2,93.09 270 top
S1  RESET  [TACTILE-SWITCH-SMD]  62.23,23.37 270 top
S2  RESET  [TACTILE-SWITCH-SMD]  123.19,23.37 270 top
S3  RESET  [TACTILE-SWITCH-SMD]  184.15,23.37 270 top
S4  RESET  [TACTILE-SWITCH-SMD]  245.11,23.37 270 top
S5  RESET  [TACTILE-SWITCH-SMD]  62.23,77.22 270 top
S6  RESET  [TACTILE-SWITCH-SMD]  123.19,77.22 270 top
S7  RESET  [TACTILE-SWITCH-SMD]  184.15,77.22 270 top
S8  RESET  [TACTILE-SWITCH-SMD]  245.11,77.22 270 top
SJ1  R-prog  [PAD-JUMPER-2-NC_BY_TRACE_YES_SILK]  31.75,24.64 90 bottom
SJ2  PWR-LED  [PAD-JUMPER-2-NC_BY_TRACE_NO_SILK]  15.24,41.78 180 bottom
SJ3  PWR-LED  [PAD-JUMPER-2-NC_BY_TRACE_NO_SILK]  76.2,41.78 180 bottom
SJ4  R-prog  [PAD-JUMPER-2-NC_BY_TRACE_YES_SILK]  92.71,24.64 90 bottom
SJ5  PWR-LED  [PAD-JUMPER-2-NC_BY_TRACE_NO_SILK]  137.16,41.78 180 bottom
SJ6  R-prog  [PAD-JUMPER-2-NC_BY_TRACE_YES_SILK]  153.67,24.64 90 bottom
SJ7  PWR-LED  [PAD-JUMPER-2-NC_BY_TRACE_NO_SILK]  198.12,41.78 180 bottom
SJ8  R-prog  [PAD-JUMPER-2-NC_BY_TRACE_YES_SILK]  214.63,24.64 90 bottom
SJ9  PWR-LED  [PAD-JUMPER-2-NC_BY_TRACE_NO_SILK]  15.24,95.63 180 bottom
SJ10  R-prog  [PAD-JUMPER-2-NC_BY_TRACE_YES_SILK]  31.75,78.49 90 bottom
SJ11  PWR-LED  [PAD-JUMPER-2-NC_BY_TRACE_NO_SILK]  76.2,95.63 180 bottom
SJ12  R-prog  [PAD-JUMPER-2-NC_BY_TRACE_YES_SILK]  92.71,78.49 90 bottom
SJ13  PWR-LED  [PAD-JUMPER-2-NC_BY_TRACE_NO_SILK]  137.16,95.63 180 bottom
SJ14  R-prog  [PAD-JUMPER-2-NC_BY_TRACE_YES_SILK]  153.67,78.49 90 bottom
SJ15  PWR-LED  [PAD-JUMPER-2-NC_BY_TRACE_NO_SILK]  198.12,95.63 180 bottom
SJ16  R-prog  [PAD-JUMPER-2-NC_BY_TRACE_YES_SILK]  214.63,78.49 90 bottom
STANDOFF1  STAND-OFF  [STAND-OFF]  64.77,14.48 0 top
STANDOFF2  STAND-OFF  [STAND-OFF]  13.97,57.66 0 top
STANDOFF3  STAND-OFF  [STAND-OFF]  12.7,9.4 0 top
STANDOFF4  STAND-OFF  [STAND-OFF]  64.77,42.42 0 top
STANDOFF5  STAND-OFF  [STAND-OFF]  73.66,9.4 0 top
STANDOFF6  STAND-OFF  [STAND-OFF]  125.73,14.48 0 top
STANDOFF7  STAND-OFF  [STAND-OFF]  74.93,57.66 0 top
STANDOFF8  STAND-OFF  [STAND-OFF]  125.73,42.42 0 top
STANDOFF9  STAND-OFF  [STAND-OFF]  134.62,9.4 0 top
STANDOFF10  STAND-OFF  [STAND-OFF]  186.69,14.48 0 top
STANDOFF11  STAND-OFF  [STAND-OFF]  135.89,57.66 0 top
STANDOFF12  STAND-OFF  [STAND-OFF]  186.69,42.42 0 top
STANDOFF13  STAND-OFF  [STAND-OFF]  195.58,9.4 0 top
STANDOFF14  STAND-OFF  [STAND-OFF]  247.65,14.48 0 top
STANDOFF15  STAND-OFF  [STAND-OFF]  196.85,57.66 0 top
STANDOFF16  STAND-OFF  [STAND-OFF]  247.65,42.42 0 top
STANDOFF17  STAND-OFF  [STAND-OFF]  12.7,63.25 0 top
STANDOFF18  STAND-OFF  [STAND-OFF]  64.77,68.33 0 top
STANDOFF19  STAND-OFF  [STAND-OFF]  13.97,111.51 0 top
STANDOFF20  STAND-OFF  [STAND-OFF]  64.77,96.27 0 top
STANDOFF21  STAND-OFF  [STAND-OFF]  73.66,63.25 0 top
STANDOFF22  STAND-OFF  [STAND-OFF]  125.73,68.33 0 top
STANDOFF23  STAND-OFF  [STAND-OFF]  74.93,111.51 0 top
STANDOFF24  STAND-OFF  [STAND-OFF]  125.73,96.27 0 top
STANDOFF25  STAND-OFF  [STAND-OFF]  134.62,63.25 0 top
STANDOFF26  STAND-OFF  [STAND-OFF]  186.69,68.33 0 top
STANDOFF27  STAND-OFF  [STAND-OFF]  135.89,111.51 0 top
STANDOFF28  STAND-OFF  [STAND-OFF]  186.69,96.27 0 top
STANDOFF29  STAND-OFF  [STAND-OFF]  195.58,63.25 0 top
STANDOFF30  STAND-OFF  [STAND-OFF]  247.65,68.33 0 top
STANDOFF31  STAND-OFF  [STAND-OFF]  196.85,111.51 0 top
STANDOFF32  STAND-OFF  [STAND-OFF]  247.65,96.27 0 top
U1  MCP73831  [SOT23-5]  27.94,26.54 180 top
U2  74AHC1G125  [SOT23-5]  25.4,39.88 270 top
U3  3.3V  [SOT23-5]  27.94,17.02 270 top
U4  ATSAMD21G-A  [TQFP-48]  48.26,37.34 180 top
U5  ATSAMD21G-A  [TQFP-48]  109.22,37.34 180 top
U6  3.3V  [SOT23-5]  88.9,17.02 270 top
U7  74AHC1G125  [SOT23-5]  86.36,39.88 270 top
U8  MCP73831  [SOT23-5]  88.9,26.54 180 top
U9  ATSAMD21G-A  [TQFP-48]  170.18,37.34 180 top
U10  3.3V  [SOT23-5]  149.86,17.02 270 top
U11  74AHC1G125  [SOT23-5]  147.32,39.88 270 top
U12  MCP73831  [SOT23-5]  149.86,26.54 180 top
U13  ATSAMD21G-A  [TQFP-48]  231.14,37.34 180 top
U14  3.3V  [SOT23-5]  210.82,17.02 270 top
U15  74AHC1G125  [SOT23-5]  208.28,39.88 270 top
U16  MCP73831  [SOT23-5]  210.82,26.54 180 top
U17  ATSAMD21G-A  [TQFP-48]  48.26,91.19 180 top
U18  3.3V  [SOT23-5]  27.94,70.87 270 top
U19  74AHC1G125  [SOT23-5]  25.4,93.73 270 top
U20  MCP73831  [SOT23-5]  27.94,80.39 180 top
U21  ATSAMD21G-A  [TQFP-48]  109.22,91.19 180 top
U22  3.3V  [SOT23-5]  88.9,70.87 270 top
U23  74AHC1G125  [SOT23-5]  86.36,93.73 270 top
U24  MCP73831  [SOT23-5]  88.9,80.39 180 top
U25  ATSAMD21G-A  [TQFP-48]  170.18,91.19 180 top
U26  3.3V  [SOT23-5]  149.86,70.87 270 top
U27  74AHC1G125  [SOT23-5]  147.32,93.73 270 top
U28  MCP73831  [SOT23-5]  149.86,80.39 180 top
U29  ATSAMD21G-A  [TQFP-48]  231.14,91.19 180 top
U30  3.3V  [SOT23-5]  210.82,70.87 270 top
U31  74AHC1G125  [SOT23-5]  208.28,93.73 270 top
U32  MCP73831  [SOT23-5]  210.82,80.39 180 top
Y1  32.768kHz  [CRYSTAL-SMD-3.2X1.5MM]  55.24,32.89 180 top
Y2  32.768kHz  [CRYSTAL-SMD-3.2X1.5MM]  116.2,32.89 180 top
Y3  32.768kHz  [CRYSTAL-SMD-3.2X1.5MM]  177.16,32.89 180 top
Y4  32.768kHz  [CRYSTAL-SMD-3.2X1.5MM]  238.12,32.89 180 top
Y5  32.768kHz  [CRYSTAL-SMD-3.2X1.5MM]  55.24,86.74 180 top
Y6  32.768kHz  [CRYSTAL-SMD-3.2X1.5MM]  116.2,86.74 180 top
Y7  32.768kHz  [CRYSTAL-SMD-3.2X1.5MM]  177.16,86.74 180 top
Y8  32.768kHz  [CRYSTAL-SMD-3.2X1.5MM]  238.12,86.74 180 top

## Library data of the parts
C1 C22 C34 C46 C58 C70 C82 C94 = SparkFun-Capacitors; PROD_ID: CAP-10009
C2 C4 C23 C24 C35 C36 C47 C48 C59 C60 C71 C72 C83 C84 C95 C96 = SparkFun-Capacitors; PROD_ID: CAP-08280
C3 C19 C31 C43 C55 C67 C79 C91 = SparkFun-Capacitors; PROD_ID: CAP-11625
C5 C20 C32 C44 C56 C68 C80 C92 = SparkFun-Capacitors; PROD_ID: CAP-07888
C6 C8 C10-C16 C21 C25-C28 C33 C37-C40 C45 C49-C52 C57 C61-C64 C69 C73-C76 C81 C85-C88 C93 = SparkFun-Capacitors; PROD_ID: CAP-00810
C7 C9 C17 C18 C29 C30 C41 C42 C53 C54 C65 C66 C77 C78 C89 C90 = SparkFun-Capacitors; PROD_ID: CAP-07881
D1 D12 D18 D24 D30 D36 D42 D48 = SparkFun-DiscreteSemi; PROD_ID: DIO-11623
D2 D3 D8 D11 D14 D17 D20 D23 D26 D29 D32 D35 D38 D41 D44 D47 = SparkFun-LED; PROD_ID: DIO-00819
D4 D9 D15 D21 D27 D33 D39 D45 = SparkFun-LED; PROD_ID: DIO-08575
D5 D7 D13 D19 D25 D31 D37 D43 = SparkFun-LED; PROD_ID: DIO-00821
D6 D10 D16 D22 D28 D34 D40 D46 = SparkFun-LED; PROD_ID: DIO-09003
E$1 = SparkFun-Retired
E$5 E$6 FID1-FID16 LOGO1-LOGO32 = SparkFun-Aesthetics
F1-F8 = SparkFun-PowerIC; PROD_ID: RES-11150
JP1 JP5 JP8 JP9 JP15-JP18 JP24-JP27 JP33-JP36 JP42-JP45 JP51-JP54 JP60-JP63 JP69-JP72 = SparkFun-Connectors
JP2 JP11 JP20 JP29 JP38 JP47 JP56 JP65 = SparkFun-Connectors; PROD_ID: CONN-11794
JP3 JP13 JP22 JP31 JP40 JP49 JP58 JP67 = SparkFun-Connectors; PROD_ID: CONN-08197
JP4 JP14 JP23 JP32 JP41 JP50 JP59 JP68 = SparkFun-Connectors; PROD_ID: CONN-11443
JP6 JP10 JP19 JP28 JP37 JP46 JP55 JP64 = samd21-temp
JP7 JP12 JP21 JP30 JP39 JP48 JP57 JP66 = SparkFun-Boards
L1-L8 = SparkFun-Passives; PROD_ID: RES-07859
Q1 Q4 Q6 Q8 Q10 Q12 Q14 Q16 = SparkFun-DiscreteSemi; PROD_ID: TRANS-11308
Q2 Q3 Q5 Q7 Q9 Q11 Q13 Q15 = SparkFun-DiscreteSemi; PROD_ID: TRANS-11151
R1 R21 R33 R45 R57 R69 R81 R93 = SparkFun-Resistors; PROD_ID: RES-08701
R2 R6-R10 R14 R15 R17 R18 R20 R22 R26 R27 R29 R30 R32 R34 R38 R39 R41 R42 R44 R46 R50 R51 R53 R54 R56 R58 R62 R63 R65 R66 R68 R70 R74 R75 R77 R78 R80 R82 R86 R87 R89 R90 R92 R94 = SparkFun-Resistors; PROD_ID: RES-00818
R3 R23 R35 R47 R59 R71 R83 R95 SJ1-SJ16 = SparkFun-Passives
R4 R12 R16 R24 R28 R36 R40 R48 R52 R60 R64 R72 R76 R84 R88 R96 = SparkFun-Resistors; PROD_ID: RES-07828
R5 R19 R31 R43 R55 R67 R79 R91 = SparkFun-Resistors; PROD_ID: RES-07871
R11 R13 R25 R37 R49 R61 R73 R85 = SparkFun-Resistors; PROD_ID: RES-00824
S1-S8 = SparkFun-Electromechanical; PROD_ID: SWCH-08247
STANDOFF1-STANDOFF32 = SparkFun-Electromechanical
U1 U8 U12 U16 U20 U24 U28 U32 = SparkFun-PowerIC; PROD_ID: IC-09995
U2 U7 U11 U15 U19 U23 U27 U31 = SparkFun-DigitalIC; PROD_ID: IC-11920
U3 U6 U10 U14 U18 U22 U26 U30 = SparkFun-PowerIC; PROD_ID: VREG-12457
U4 U5 U9 U13 U17 U21 U25 U29 = samd21-temp; PROD_ID: IC-13064
Y1-Y8 = samd21-temp; PROD_ID: XTAL-13062

## Nets
3.3V: C5.1 C8.1 C11.1 C12.1 JP6.1 JP7.3.3V JP7.IOREF JP7.VCC L1.1 R7.2 R8.2 R9.2 R10.2 R11.2 U3.5 U4.17 U4.36 U4.44
3.3V1: C13.1 C16.1 C20.1 C21.1 JP10.1 JP12.3.3V JP12.IOREF JP12.VCC L2.1 R13.2 R14.2 R15.2 R18.2 R20.2 U5.17 U5.36 U5.44 U6.5
3.3V2: C25.1 C28.1 C32.1 C33.1 JP19.1 JP21.3.3V JP21.IOREF JP21.VCC L3.1 R25.2 R26.2 R27.2 R30.2 R32.2 U9.17 U9.36 U9.44 U10.5
3.3V3: C37.1 C40.1 C44.1 C45.1 JP28.1 JP30.3.3V JP30.IOREF JP30.VCC L4.1 R37.2 R38.2 R39.2 R42.2 R44.2 U13.17 U13.36 U13.44 U14.5
3.3V4: C49.1 C52.1 C56.1 C57.1 JP37.1 JP39.3.3V JP39.IOREF JP39.VCC L5.1 R49.2 R50.2 R51.2 R54.2 R56.2 U17.17 U17.36 U17.44 U18.5
3.3V5: C61.1 C64.1 C68.1 C69.1 JP46.1 JP48.3.3V JP48.IOREF JP48.VCC L6.1 R61.2 R62.2 R63.2 R66.2 R68.2 U21.17 U21.36 U21.44 U22.5
3.3V6: C73.1 C76.1 C80.1 C81.1 JP55.1 JP57.3.3V JP57.IOREF JP57.VCC L7.1 R73.2 R74.2 R75.2 R78.2 R80.2 U25.17 U25.36 U25.44 U26.5
3.3V7: C85.1 C88.1 C92.1 C93.1 JP64.1 JP66.3.3V JP66.IOREF JP66.VCC L8.1 R85.2 R86.2 R87.2 R90.2 R92.2 U29.17 U29.36 U29.44 U30.5
!RESET: JP6.10 JP7.RESET@1 JP7.RESET@2 R11.1 S1.3 U4.40
!RESET1: JP10.10 JP12.RESET@1 JP12.RESET@2 R13.1 S2.3 U5.40
!RESET2: JP19.10 JP21.RESET@1 JP21.RESET@2 R25.1 S3.3 U9.40
!RESET3: JP28.10 JP30.RESET@1 JP30.RESET@2 R37.1 S4.3 U13.40
!RESET4: JP37.10 JP39.RESET@1 JP39.RESET@2 R49.1 S5.3 U17.40
!RESET5: JP46.10 JP48.RESET@1 JP48.RESET@2 R61.1 S6.3 U21.40
!RESET6: JP55.10 JP57.RESET@1 JP57.RESET@2 R73.1 S7.3 U25.40
!RESET7: JP64.10 JP66.RESET@1 JP66.RESET@2 R85.1 S8.3 U29.40
A0: JP7.A0 U4.3
A1: JP7.A1 U4.7
A2: JP7.A2 U4.8
A3: JP7.A3 U4.9
A4: JP7.A4 U4.10
A5: JP7.A5 U4.47
A6: JP12.A3 U5.9
A7: JP12.A2 U5.8
A8: JP12.A1 U5.7
A9: JP12.A0 U5.3
A10: JP12.A4 U5.10
A11: JP12.A5 U5.47
A12: JP21.A3 U9.9
A13: JP21.A2 U9.8
A14: JP21.A1 U9.7
A15: JP21.A0 U9.3
A16: JP21.A4 U9.10
A17: JP21.A5 U9.47
A18: JP30.A3 U13.9
A19: JP30.A2 U13.8
A20: JP30.A1 U13.7
A21: JP30.A0 U13.3
A22: JP30.A4 U13.10
A23: JP30.A5 U13.47
A24: JP39.A3 U17.9
A25: JP39.A2 U17.8
A26: JP39.A1 U17.7
A27: JP39.A0 U17.3
A28: JP39.A4 U17.10
A29: JP39.A5 U17.47
A30: JP48.A3 U21.9
A31: JP48.A2 U21.8
A32: JP48.A1 U21.7
A33: JP48.A0 U21.3
A34: JP48.A4 U21.10
A35: JP48.A5 U21.47
A36: JP57.A3 U25.9
A37: JP57.A2 U25.8
A38: JP57.A1 U25.7
A39: JP57.A0 U25.3
A40: JP57.A4 U25.10
A41: JP57.A5 U25.47
A42: JP66.A3 U29.9
A43: JP66.A2 U29.8
A44: JP66.A1 U29.7
A45: JP66.A0 U29.3
A46: JP66.A4 U29.10
A47: JP66.A5 U29.47
AREF: JP7.AREF U4.4
AREF1: JP12.AREF U5.4
AREF2: JP21.AREF U9.4
AREF3: JP30.AREF U13.4
AREF4: JP39.AREF U17.4
AREF5: JP48.AREF U21.4
AREF6: JP57.AREF U25.4
AREF7: JP66.AREF U29.4
CHG_STAT: R6.2 U1.1
CHG_STAT1: R22.2 U8.1
CHG_STAT2: R34.2 U12.1
CHG_STAT3: R46.2 U16.1
CHG_STAT4: R58.2 U20.1
CHG_STAT5: R70.2 U24.1
CHG_STAT6: R82.2 U28.1
CHG_STAT7: R94.2 U32.1
D0/RXI: JP7.D0 U4.16
D0/RXI1: JP12.D0 U5.16
D0/RXI2: JP21.D0 U9.16
D0/RXI3: JP30.D0 U13.16
D0/RXI4: JP39.D0 U17.16
D0/RXI5: JP48.D0 U21.16
D0/RXI6: JP57.D0 U25.16
D0/RXI7: JP66.D0 U29.16
D1: JP12.D4 U5.13
D1/TXO: JP7.D1 U4.15
D1/TXO1: JP12.D1 U5.15
D1/TXO2: JP21.D1 U9.15
D1/TXO3: JP30.D1 U13.15
D1/TXO4: JP39.D1 U17.15
D1/TXO5: JP48.D1 U21.15
D1/TXO6: JP57.D1 U25.15
D1/TXO7: JP66.D1 U29.15
D2: JP7.D2 U4.23
D3: JP7.D3 U4.14
D4: JP7.D4 U4.13
D5: JP7.D5 U4.24
D6: JP7.D6 U4.29
D7: JP7.D7 U4.30
D8: JP7.D8 U4.11
D9: JP7.D9 U4.12
D10: JP7.D10 U4.27
D11: JP7.D11 U4.25
D12: JP7.D12 U4.28
D13: JP7.D13 Q2.1 R12.2 U4.26
D14: JP12.D3 U5.14
D15: JP12.D2 U5.23
D16: JP12.D5 U5.24
D17: JP12.D6 U5.29
D18: JP12.D7 U5.30
D19: JP12.D8 U5.11
D20: JP12.D9 U5.12
D21: JP12.D12 U5.28
D22: JP12.D11 U5.25
D23: JP12.D10 U5.27
D24: JP12.D13 Q3.1 R24.2 U5.26
D25: JP21.D4 U9.13
D26: JP21.D3 U9.14
D27: JP21.D2 U9.23
D28: JP21.D5 U9.24
D29: JP21.D6 U9.29
D30: JP21.D7 U9.30
D31: JP21.D8 U9.11
D32: JP21.D9 U9.12
D33: JP21.D12 U9.28
D34: JP21.D11 U9.25
D35: JP21.D10 U9.27
D36: JP21.D13 Q5.1 R36.2 U9.26
D37: JP30.D4 U13.13
D38: JP30.D3 U13.14
D39: JP30.D2 U13.23
D40: JP30.D5 U13.24
D41: JP30.D6 U13.29
D42: JP30.D7 U13.30
D43: JP30.D8 U13.11
D44: JP30.D9 U13.12
D45: JP30.D12 U13.28
D46: JP30.D11 U13.25
D47: JP30.D10 U13.27
D48: JP30.D13 Q7.1 R48.2 U13.26
D49: JP39.D4 U17.13
D50: JP39.D3 U17.14
D51: JP39.D2 U17.23
D52: JP39.D5 U17.24
D53: JP39.D6 U17.29
D54: JP39.D7 U17.30
D55: JP39.D8 U17.11
D56: JP39.D9 U17.12
D57: JP39.D12 U17.28
D58: JP39.D11 U17.25
D59: JP39.D10 U17.27
D60: JP39.D13 Q9.1 R60.2 U17.26
D61: JP48.D4 U21.13
D62: JP48.D3 U21.14
D63: JP48.D2 U21.23
D64: JP48.D5 U21.24
D65: JP48.D6 U21.29
D66: JP48.D7 U21.30
D67: JP48.D8 U21.11
D68: JP48.D9 U21.12
D69: JP48.D12 U21.28
D70: JP48.D11 U21.25
D71: JP48.D10 U21.27
D72: JP48.D13 Q11.1 R72.2 U21.26
D73: JP57.D4 U25.13
D74: JP57.D3 U25.14
D75: JP57.D2 U25.23
D76: JP57.D5 U25.24
D77: JP57.D6 U25.29
D78: JP57.D7 U25.30
D79: JP57.D8 U25.11
D80: JP57.D9 U25.12
D81: JP57.D12 U25.28
D82: JP57.D11 U25.25
D83: JP57.D10 U25.27
D84: JP57.D13 Q13.1 R84.2 U25.26
D85: JP66.D4 U29.13
D86: JP66.D3 U29.14
D87: JP66.D2 U29.23
D88: JP66.D5 U29.24
D89: JP66.D6 U29.29
D90: JP66.D7 U29.30
D91: JP66.D8 U29.11
D92: JP66.D9 U29.12
D93: JP66.D12 U29.28
D94: JP66.D11 U29.25
D95: JP66.D10 U29.27
D96: JP66.D13 Q15.1 R96.2 U29.26
GND: C1.2 C2.2 C3.2 C4.2 C5.2 C6.2 C7.2 C8.2 C9.1 C10.2 C11.2 C12.2 JP1.1 JP2.GND1 JP2.SHIELD1 JP2.SHIELD2 JP2.SHIELD3 JP3.GND JP3.GNDBREAK JP4.1 JP6.3 JP6.5 JP7.GND@1 JP7.GND@2 JP7.GND@3 JP7.GND@4 JP8.1 JP9.1 Q2.2 R1.1 R3.1 R12.1 S1.1 SJ2.1 U1.2 U2.3 U3.2 U4.5 U4.18 U4.35 U4.42
GND1: C13.2 C14.2 C15.2 C16.2 C17.1 C18.2 C19.2 C20.2 C21.2 C22.2 C23.2 C24.2 JP10.3 JP10.5 JP11.GND1 JP11.SHIELD1 JP11.SHIELD2 JP11.SHIELD3 JP12.GND@1 JP12.GND@2 JP12.GND@3 JP12.GND@4 JP13.GND JP13.GNDBREAK JP14.1 JP15.1 JP17.1 JP18.1 Q3.2 R21.1 R23.1 R24.1 S2.1 SJ3.1 U5.5 U5.18 U5.35 U5.42 U6.2 U7.3 U8.2
GND2: C25.2 C26.2 C27.2 C28.2 C29.1 C30.2 C31.2 C32.2 C33.2 C34.2 C35.2 C36.2 JP19.3 JP19.5 JP20.GND1 JP20.SHIELD1 JP20.SHIELD2 JP20.SHIELD3 JP21.GND@1 JP21.GND@2 JP21.GND@3 JP21.GND@4 JP22.GND JP22.GNDBREAK JP23.1 JP24.1 JP26.1 JP27.1 Q5.2 R33.1 R35.1 R36.1 S3.1 SJ5.1 U9.5 U9.18 U9.35 U9.42 U10.2 U11.3 U12.2
GND3: C37.2 C38.2 C39.2 C40.2 C41.1 C42.2 C43.2 C44.2 C45.2 C46.2 C47.2 C48.2 JP28.3 JP28.5 JP29.GND1 JP29.SHIELD1 JP29.SHIELD2 JP29.SHIELD3 JP30.GND@1 JP30.GND@2 JP30.GND@3 JP30.GND@4 JP31.GND JP31.GNDBREAK JP32.1 JP33.1 JP35.1 JP36.1 Q7.2 R45.1 R47.1 R48.1 S4.1 SJ7.1 U13.5 U13.18 U13.35 U13.42 U14.2 U15.3 U16.2
GND4: C49.2 C50.2 C51.2 C52.2 C53.1 C54.2 C55.2 C56.2 C57.2 C58.2 C59.2 C60.2 JP37.3 JP37.5 JP38.GND1 JP38.SHIELD1 JP38.SHIELD2 JP38.SHIELD3 JP39.GND@1 JP39.GND@2 JP39.GND@3 JP39.GND@4 JP40.GND JP40.GNDBREAK JP41.1 JP42.1 JP44.1 JP45.1 Q9.2 R57.1 R59.1 R60.1 S5.1 SJ9.1 U17.5 U17.18 U17.35 U17.42 U18.2 U19.3 U20.2
GND5: C61.2 C62.2 C63.2 C64.2 C65.1 C66.2 C67.2 C68.2 C69.2 C70.2 C71.2 C72.2 JP46.3 JP46.5 JP47.GND1 JP47.SHIELD1 JP47.SHIELD2 JP47.SHIELD3 JP48.GND@1 JP48.GND@2 JP48.GND@3 JP48.GND@4 JP49.GND JP49.GNDBREAK JP50.1 JP51.1 JP53.1 JP54.1 Q11.2 R69.1 R71.1 R72.1 S6.1 SJ11.1 U21.5 U21.18 U21.35 U21.42 U22.2 U23.3 U24.2
GND6: C73.2 C74.2 C75.2 C76.2 C77.1 C78.2 C79.2 C80.2 C81.2 C82.2 C83.2 C84.2 JP55.3 JP55.5 JP56.GND1 JP56.SHIELD1 JP56.SHIELD2 JP56.SHIELD3 JP57.GND@1 JP57.GND@2 JP57.GND@3 JP57.GND@4 JP58.GND JP58.GNDBREAK JP59.1 JP60.1 JP62.1 JP63.1 Q13.2 R81.1 R83.1 R84.1 S7.1 SJ13.1 U25.5 U25.18 U25.35 U25.42 U26.2 U27.3 U28.2
GND7: C85.2 C86.2 C87.2 C88.2 C89.1 C90.2 C91.2 C92.2 C93.2 C94.2 C95.2 C96.2 JP64.3 JP64.5 JP65.GND1 JP65.SHIELD1 JP65.SHIELD2 JP65.SHIELD3 JP66.GND@1 JP66.GND@2 JP66.GND@3 JP66.GND@4 JP67.GND JP67.GNDBREAK JP68.1 JP69.1 JP71.1 JP72.1 Q15.2 R93.1 R95.1 R96.1 S8.1 SJ15.1 U29.5 U29.18 U29.35 U29.42 U30.2 U31.3 U32.2
N$1: F1.1 JP2.VBUS1
N$2: C9.2 U4.1 Y1.P$2
N$3: D4.C Q2.3
N$4: C7.1 U4.2 Y1.P$1
N$5: D3.A R7.1
N$6: D4.A R8.1
N$7: C17.2 U5.1 Y2.P$2
N$8: D2.C R6.1
N$9: C18.1 U5.2 Y2.P$1
N$10: D5.A R9.1
N$11: D6.A R10.1
N$12: D3.C SJ2.2
N$13: R1.2 SJ1.1
N$14: D8.A R14.1
N$15: R3.2 SJ1.2 U1.5
N$16: D9.A R15.1
N$17: D9.C Q3.3
N$18: F2.1 JP11.VBUS1
N$19: D7.A R18.1
N$20: D10.A R20.1
N$21: D8.C SJ3.2
N$22: R21.2 SJ4.1
N$23: R23.2 SJ4.2 U8.5
N$24: D11.C R22.1
N$25: C29.2 U9.1 Y3.P$2
N$26: C30.1 U9.2 Y3.P$1
N$27: D14.A R26.1
N$28: D15.A R27.1
N$29: D15.C Q5.3
N$30: F3.1 JP20.VBUS1
N$31: D13.A R30.1
N$32: D16.A R32.1
N$33: D14.C SJ5.2
N$34: R33.2 SJ6.1
N$35: R35.2 SJ6.2 U12.5
N$36: D17.C R34.1
N$37: C41.2 U13.1 Y4.P$2
N$38: C42.1 U13.2 Y4.P$1
N$39: D20.A R38.1
N$40: D21.A R39.1
N$41: D21.C Q7.3
N$42: F4.1 JP29.VBUS1
N$43: D19.A R42.1
N$44: D22.A R44.1
N$45: D20.C SJ7.2
N$46: R45.2 SJ8.1
N$47: R47.2 SJ8.2 U16.5
N$48: D23.C R46.1
N$49: C53.2 U17.1 Y5.P$2
N$50: C54.1 U17.2 Y5.P$1
N$51: D26.A R50.1
N$52: D27.A R51.1
N$53: D27.C Q9.3
N$54: F5.1 JP38.VBUS1
N$55: D25.A R54.1
N$56: D28.A R56.1
N$57: D26.C SJ9.2
N$58: R57.2 SJ10.1
N$59: R59.2 SJ10.2 U20.5
N$60: D29.C R58.1
N$61: C65.2 U21.1 Y6.P$2
N$62: C66.1 U21.2 Y6.P$1
N$63: D32.A R62.1
N$64: D33.A R63.1
N$65: D33.C Q11.3
N$66: F6.1 JP47.VBUS1
N$67: D31.A R66.1
N$68: D34.A R68.1
N$69: D32.C SJ11.2
N$70: R69.2 SJ12.1
N$71: R71.2 SJ12.2 U24.5
N$72: D35.C R70.1
N$73: C77.2 U25.1 Y7.P$2
N$74: C78.1 U25.2 Y7.P$1
N$75: D38.A R74.1
N$76: D39.A R75.1
N$77: D39.C Q13.3
N$78: F7.1 JP56.VBUS1
N$79: D37.A R78.1
N$80: D40.A R80.1
N$81: D38.C SJ13.2
N$82: R81.2 SJ14.1
N$83: R83.2 SJ14.2 U28.5
N$84: D41.C R82.1
N$85: C89.2 U29.1 Y8.P$2
N$86: C90.1 U29.2 Y8.P$1
N$87: D44.A R86.1
N$88: D45.A R87.1
N$89: D45.C Q15.3
N$90: F8.1 JP65.VBUS1
N$91: D43.A R90.1
N$92: D46.A R92.1
N$93: D44.C SJ15.2
N$94: R93.2 SJ16.1
N$95: R95.2 SJ16.2 U32.5
N$96: D47.C R94.1
PA1: JP16.5 U5.22
PA2: JP25.5 U9.22
PA3: JP34.5 U13.22
PA4: JP43.5 U17.22
PA5: JP52.5 U21.22
PA6: JP61.5 U25.22
PA7: JP70.5 U29.22
PA13: JP5.5 U4.22
PB1: JP16.4 U5.37
PB2: JP16.3 U5.38
PB3: JP25.4 U9.37
PB4: JP25.3 U9.38
PB5: JP34.4 U13.37
PB6: JP34.3 U13.38
PB7: JP43.4 U17.37
PB8: JP43.3 U17.38
PB9: JP52.4 U21.37
PB10: JP52.3 U21.38
PB11: JP61.4 U25.37
PB12: JP61.3 U25.38
PB13: JP70.4 U29.37
PB14: JP70.3 U29.38
PB22: JP5.4 U4.37
PB23: JP5.3 U4.38
RX_LED: D6.C U4.48
RX_LED1: D10.C U5.48
RX_LED2: D16.C U9.48
RX_LED3: D22.C U13.48
RX_LED4: D28.C U17.48
RX_LED5: D34.C U21.48
RX_LED6: D40.C U25.48
RX_LED7: D46.C U29.48
SCL: JP7.SCL U4.32
SCL1: JP12.SCL U5.32
SCL2: JP21.SCL U9.32
SCL3: JP30.SCL U13.32
SCL4: JP39.SCL U17.32
SCL5: JP48.SCL U21.32
SCL6: JP57.SCL U25.32
SCL7: JP66.SCL U29.32
SDA: JP7.SDA U4.31
SDA1: JP12.SDA U5.31
SDA2: JP21.SDA U9.31
SDA3: JP30.SDA U13.31
SDA4: JP39.SDA U17.31
SDA5: JP48.SDA U21.31
SDA6: JP57.SDA U25.31
SDA7: JP66.SDA U29.31
SPI_MISO: JP7.MISO U4.21
SPI_MISO1: JP12.MISO U5.21
SPI_MISO2: JP21.MISO U9.21
SPI_MISO3: JP30.MISO U13.21
SPI_MISO4: JP39.MISO U17.21
SPI_MISO5: JP48.MISO U21.21
SPI_MISO6: JP57.MISO U25.21
SPI_MISO7: JP66.MISO U29.21
SPI_MOSI: JP7.MOSI U4.19
SPI_MOSI1: JP12.MOSI U5.19
SPI_MOSI2: JP21.MOSI U9.19
SPI_MOSI3: JP30.MOSI U13.19
SPI_MOSI4: JP39.MOSI U17.19
SPI_MOSI5: JP48.MOSI U21.19
SPI_MOSI6: JP57.MOSI U25.19
SPI_MOSI7: JP66.MOSI U29.19
SPI_SCK: JP7.SCK U4.20
SPI_SCK1: JP12.SCK U5.20
SPI_SCK2: JP21.SCK U9.20
SPI_SCK3: JP30.SCK U13.20
SPI_SCK4: JP39.SCK U17.20
SPI_SCK5: JP48.SCK U21.20
SPI_SCK6: JP57.SCK U25.20
SPI_SCK7: JP66.SCK U29.20
SWCLK: JP5.2 JP6.4 U4.45
SWCLK1: JP10.4 JP16.2 U5.45
SWCLK2: JP19.4 JP25.2 U9.45
SWCLK3: JP28.4 JP34.2 U13.45
SWCLK4: JP37.4 JP43.2 U17.45
SWCLK5: JP46.4 JP52.2 U21.45
SWCLK6: JP55.4 JP61.2 U25.45
SWCLK7: JP64.4 JP70.2 U29.45
SWDIO: JP5.1 JP6.2 U4.46
SWDIO1: JP10.2 JP16.1 U5.46
SWDIO2: JP19.2 JP25.1 U9.46
SWDIO3: JP28.2 JP34.1 U13.46
SWDIO4: JP37.2 JP43.1 U17.46
SWDIO5: JP46.2 JP52.1 U21.46
SWDIO6: JP55.2 JP61.1 U25.46
SWDIO7: JP64.2 JP70.1 U29.46
TX_LED: D5.C U4.39
TX_LED1: D7.C U5.39
TX_LED2: D13.C U9.39
TX_LED3: D19.C U13.39
TX_LED4: D25.C U17.39
TX_LED5: D31.C U21.39
TX_LED6: D37.C U25.39
TX_LED7: D43.C U29.39
USB_D+: JP2.D+1 U4.34
USB_D+1: JP11.D+1 U5.34
USB_D+2: JP20.D+1 U9.34
USB_D+3: JP29.D+1 U13.34
USB_D+4: JP38.D+1 U17.34
USB_D+5: JP47.D+1 U21.34
USB_D+6: JP56.D+1 U25.34
USB_D+7: JP65.D+1 U29.34
USB_D-: JP2.D-1 U4.33
USB_D-1: JP11.D-1 U5.33
USB_D-2: JP20.D-1 U9.33
USB_D-3: JP29.D-1 U13.33
USB_D-4: JP38.D-1 U17.33
USB_D-5: JP47.D-1 U21.33
USB_D-6: JP56.D-1 U25.33
USB_D-7: JP65.D-1 U29.33
USB_HOST_EN: R2.1 U4.41
USB_HOST_EN1: R17.1 U5.41
USB_HOST_EN2: R29.1 U9.41
USB_HOST_EN3: R41.1 U13.41
USB_HOST_EN4: R53.1 U17.41
USB_HOST_EN5: R65.1 U21.41
USB_HOST_EN6: R77.1 U25.41
USB_HOST_EN7: R89.1 U29.41
USB_HOST_POWER_EN: Q1.1 R5.1 U2.4
USB_HOST_POWER_EN1: Q4.1 R19.1 U7.4
USB_HOST_POWER_EN2: Q6.1 R31.1 U11.4
USB_HOST_POWER_EN3: Q8.1 R43.1 U15.4
USB_HOST_POWER_EN4: Q10.1 R55.1 U19.4
USB_HOST_POWER_EN5: Q12.1 R67.1 U23.4
USB_HOST_POWER_EN6: Q14.1 R79.1 U27.4
USB_HOST_POWER_EN7: Q16.1 R91.1 U31.4
USB_ID: JP2.ID1 R2.2 R4.1 U2.1 U2.2
USB_ID1: JP11.ID1 R16.1 R17.2 U7.1 U7.2
USB_ID2: JP20.ID1 R28.1 R29.2 U11.1 U11.2
USB_ID3: JP29.ID1 R40.1 R41.2 U15.1 U15.2
USB_ID4: JP38.ID1 R52.1 R53.2 U19.1 U19.2
USB_ID5: JP47.ID1 R64.1 R65.2 U23.1 U23.2
USB_ID6: JP56.ID1 R76.1 R77.2 U27.1 U27.2
USB_ID7: JP65.ID1 R88.1 R89.2 U31.1 U31.2
VBAT: C2.1 D1.A JP4.2 JP8.2 JP9.2 U1.3
VBAT1: C23.1 D12.A JP14.2 JP17.2 JP18.2 U8.3
VBAT2: C35.1 D18.A JP23.2 JP26.2 JP27.2 U12.3
VBAT3: C47.1 D24.A JP32.2 JP35.2 JP36.2 U16.3
VBAT4: C59.1 D30.A JP41.2 JP44.2 JP45.2 U20.3
VBAT5: C71.1 D36.A JP50.2 JP53.2 JP54.2 U24.3
VBAT6: C83.1 D42.A JP59.2 JP62.2 JP63.2 U28.3
VBAT7: C95.1 D48.A JP68.2 JP71.2 JP72.2 U32.3
VDDANA: C6.1 L1.2 U4.6
VDDANA1: C15.1 L2.2 U5.6
VDDANA2: C27.1 L3.2 U9.6
VDDANA3: C39.1 L4.2 U13.6
VDDANA4: C51.1 L5.2 U17.6
VDDANA5: C63.1 L6.2 U21.6
VDDANA6: C75.1 L7.2 U25.6
VDDANA7: C87.1 L8.2 U29.6
VDDCORE: C10.1 U4.43
VDDCORE1: C14.1 U5.43
VDDCORE2: C26.1 U9.43
VDDCORE3: C38.1 U13.43
VDDCORE4: C50.1 U17.43
VDDCORE5: C62.1 U21.43
VDDCORE6: C74.1 U25.43
VDDCORE7: C86.1 U29.43
VIN: C3.1 C4.1 D1.C D2.A JP1.2 JP3.PWR JP7.VIN Q1.2 R4.2 R5.2 U1.4 U2.5 U3.1 U3.3
VIN1: C19.1 C24.1 D11.A D12.C JP12.VIN JP13.PWR JP15.2 Q4.2 R16.2 R19.2 U6.1 U6.3 U7.5 U8.4
VIN2: C31.1 C36.1 D17.A D18.C JP21.VIN JP22.PWR JP24.2 Q6.2 R28.2 R31.2 U10.1 U10.3 U11.5 U12.4
VIN3: C43.1 C48.1 D23.A D24.C JP30.VIN JP31.PWR JP33.2 Q8.2 R40.2 R43.2 U14.1 U14.3 U15.5 U16.4
VIN4: C55.1 C60.1 D29.A D30.C JP39.VIN JP40.PWR JP42.2 Q10.2 R52.2 R55.2 U18.1 U18.3 U19.5 U20.4
VIN5: C67.1 C72.1 D35.A D36.C JP48.VIN JP49.PWR JP51.2 Q12.2 R64.2 R67.2 U22.1 U22.3 U23.5 U24.4
VIN6: C79.1 C84.1 D41.A D42.C JP57.VIN JP58.PWR JP60.2 Q14.2 R76.2 R79.2 U26.1 U26.3 U27.5 U28.4
VIN7: C91.1 C96.1 D47.A D48.C JP66.VIN JP67.PWR JP69.2 Q16.2 R88.2 R91.2 U30.1 U30.3 U31.5 U32.4
VUSB: C1.1 F1.2 JP7.5V Q1.3
VUSB1: C22.1 F2.2 JP12.5V Q4.3
VUSB2: C34.1 F3.2 JP21.5V Q6.3
VUSB3: C46.1 F4.2 JP30.5V Q8.3
VUSB4: C58.1 F5.2 JP39.5V Q10.3
VUSB5: C70.1 F6.2 JP48.5V Q12.3
VUSB6: C82.1 F7.2 JP57.5V Q14.3
VUSB7: C94.1 F8.2 JP66.5V Q16.3

## Tracks (layer width: path | path; a pad name or v marks a point on that pad's centre or on a via)
3.3V  (via drill 0.38)
  Top 0.203: U4.17 49.01,42.66 49.15,42.8 49.74,42.8 C12.1 | R11.2 58.42,27.18 v60.96,29.72 | R7.2 v15.24,40.51 | v15.24,37.97 R8.2 | R9.2 v15.24,35.43
  Top 0.254: 45.07,34.59 46.8,36.32 49.01,36.32 | 30.48,30.99 20.07,30.99 18.16,32.89 v15.24,32.89 R10.2 | JP7.IOREF 31.75,11.94
  Top 0.279: U4.17 v49.01,37.59 49.01,36.32 U4.44 49.01,31.93 | 45.07,34.59 U4.36 42.76,34.59 C11.1
  Top 0.305: L1.1 57.06,35.85 v57.15,35.94 | 49.01,31.93 49.01,30.99 | 49.01,30.99 49.01,29.39 v47.62,28 | C8.1 49.01,30.99
  Top 0.406: 42.76,34.59 35.77,34.59 33.02,37.34 31.75,37.34 30.48,36.07 30.48,30.99 34.29,27.18 34.29,22.1 31.75,19.56 31.75,17.97 | U3.5 30.48,17.97 | 30.48,17.97 31.75,17.97 | C5.1 29.84,19.56 30.48,18.92 30.48,17.97 | JP7.3.3V 31.75,11.94 31.75,17.97
  Bottom 0.203: v60.96,29.72 60.96,34.8 58.48,37.27 | v15.24,40.51 v15.24,37.97 v15.24,35.43 v15.24,32.89
  Bottom 0.305: v49.01,37.59 55.5,37.59 v57.15,35.94 58.48,37.27 59.82,38.61 63.59,38.61 JP7.VCC | v47.62,28 JP6.1
3.3V1  (via drill 0.38)
  Top 0.203: U5.17 109.97,42.66 110.11,42.8 110.7,42.8 C21.1 | R13.2 119.38,27.18 v121.92,29.72 | R14.2 v76.2,40.51 | v76.2,37.97 R15.2 | R18.2 v76.2,35.43
  Top 0.254: 106.03,34.59 107.76,36.32 109.97,36.32 | 91.44,30.99 81.03,30.99 79.12,32.89 v76.2,32.89 R20.2 | JP12.IOREF 92.71,11.94
  Top 0.279: U5.17 v109.97,37.59 109.97,36.32 U5.44 109.97,31.93 | 106.03,34.59 U5.36 103.72,34.59 C16.1
  Top 0.305: L2.1 118.02,35.85 v118.11,35.94 | 109.97,31.93 109.97,30.99 | 109.97,30.99 109.97,29.39 v108.58,28 | C13.1 109.97,30.99
  Top 0.406: 103.72,34.59 96.73,34.59 93.98,37.34 92.71,37.34 91.44,36.07 91.44,30.99 95.25,27.18 95.25,22.1 92.71,19.56 92.71,17.97 | U6.5 91.44,17.97 | 91.44,17.97 92.71,17.97 | C20.1 90.81,19.56 91.44,18.92 91.44,17.97 | JP12.3.3V 92.71,11.94 92.71,17.97
  Bottom 0.203: v121.92,29.72 121.92,34.8 119.44,37.27 | v76.2,40.51 v76.2,37.97 v76.2,35.43 v76.2,32.89
  Bottom 0.305: v109.97,37.59 116.46,37.59 v118.11,35.94 119.44,37.27 120.78,38.61 124.55,38.61 JP12.VCC | v108.58,28 JP10.1
3.3V2  (via drill 0.38)
  Top 0.203: U9.17 170.93,42.66 171.07,42.8 171.66,42.8 C33.1 | R25.2 180.34,27.18 v182.88,29.72 | R26.2 v137.16,40.51 | v137.16,37.97 R27.2 | R30.2 v137.16,35.43
  Top 0.254: 166.99,34.59 168.72,36.32 170.93,36.32 | 152.4,30.99 141.99,30.99 140.08,32.89 v137.16,32.89 R32.2 | JP21.IOREF 153.67,11.94
  Top 0.279: U9.17 v170.93,37.59 170.93,36.32 U9.44 170.93,31.93 | 166.99,34.59 U9.36 164.68,34.59 C28.1
  Top 0.305: L3.1 178.98,35.85 v179.07,35.94 | 170.93,31.93 170.93,30.99 | 170.93,30.99 170.93,29.39 v169.54,28 | C25.1 170.93,30.99
  Top 0.406: 164.68,34.59 157.69,34.59 154.94,37.34 153.67,37.34 152.4,36.07 152.4,30.99 156.21,27.18 156.21,22.1 153.67,19.56 153.67,17.97 | U10.5 152.4,17.97 | 152.4,17.97 153.67,17.97 | C32.1 151.76,19.56 152.4,18.92 152.4,17.97 | JP21.3.3V 153.67,11.94 153.67,17.97
  Bottom 0.203: v182.88,29.72 182.88,34.8 180.4,37.27 | v137.16,40.51 v137.16,37.97 v137.16,35.43 v137.16,32.89
  Bottom 0.305: v170.93,37.59 177.42,37.59 v179.07,35.94 180.4,37.27 181.74,38.61 185.51,38.61 JP21.VCC | v169.54,28 JP19.1
3.3V3  (via drill 0.38)
  Top 0.203: U13.17 231.89,42.66 232.03,42.8 232.62,42.8 C45.1 | R37.2 241.3,27.18 v243.84,29.72 | R38.2 v198.12,40.51 | v198.12,37.97 R39.2 | R42.2 v198.12,35.43
  Top 0.254: 227.95,34.59 229.68,36.32 231.89,36.32 | 213.36,30.99 202.95,30.99 201.04,32.89 v198.12,32.89 R44.2 | JP30.IOREF 214.63,11.94
  Top 0.279: U13.17 v231.89,37.59 231.89,36.32 U13.44 231.89,31.93 | 227.95,34.59 U13.36 225.64,34.59 C40.1
  Top 0.305: L4.1 239.94,35.85 v240.03,35.94 | 231.89,31.93 231.89,30.99 | 231.89,30.99 231.89,29.39 v230.5,28 | C37.1 231.89,30.99
  Top 0.406: 225.64,34.59 218.65,34.59 215.9,37.34 214.63,37.34 213.36,36.07 213.36,30.99 217.17,27.18 217.17,22.1 214.63,19.56 214.63,17.97 | U14.5 213.36,17.97 | 213.36,17.97 214.63,17.97 | C44.1 212.72,19.56 213.36,18.92 213.36,17.97 | JP30.3.3V 214.63,11.94 214.63,17.97
  Bottom 0.203: v243.84,29.72 243.84,34.8 241.36,37.27 | v198.12,40.51 v198.12,37.97 v198.12,35.43 v198.12,32.89
  Bottom 0.305: v231.89,37.59 238.38,37.59 v240.03,35.94 241.36,37.27 242.7,38.61 246.47,38.61 JP30.VCC | v230.5,28 JP28.1
3.3V4  (via drill 0.38)
  Top 0.203: U17.17 49.01,96.51 49.15,96.65 49.74,96.65 C57.1 | R49.2 58.42,81.03 v60.96,83.57 | R50.2 v15.24,94.36 | v15.24,91.82 R51.2 | R54.2 v15.24,89.28
  Top 0.254: 45.07,88.44 46.8,90.17 49.01,90.17 | 30.48,84.84 20.07,84.84 18.16,86.74 v15.24,86.74 R56.2 | JP39.IOREF 31.75,65.79
  Top 0.279: U17.17 v49.01,91.44 49.01,90.17 U17.44 49.01,85.78 | 45.07,88.44 U17.36 42.76,88.44 C52.1